# Altium PCB ControlBoard_v3.PcbDoc (part 3 of 3)
Units mm, origin at the board's own origin, x right, y up, seen from the top; angles counter-clockwise.
Board outline 113.28 x 137.67 mm, 2 copper layers (Top Layer, Bottom Layer); 118 components, 107 nets, 631 pads, 214 vias.
Unrouted connection lines stored in the file: 3.
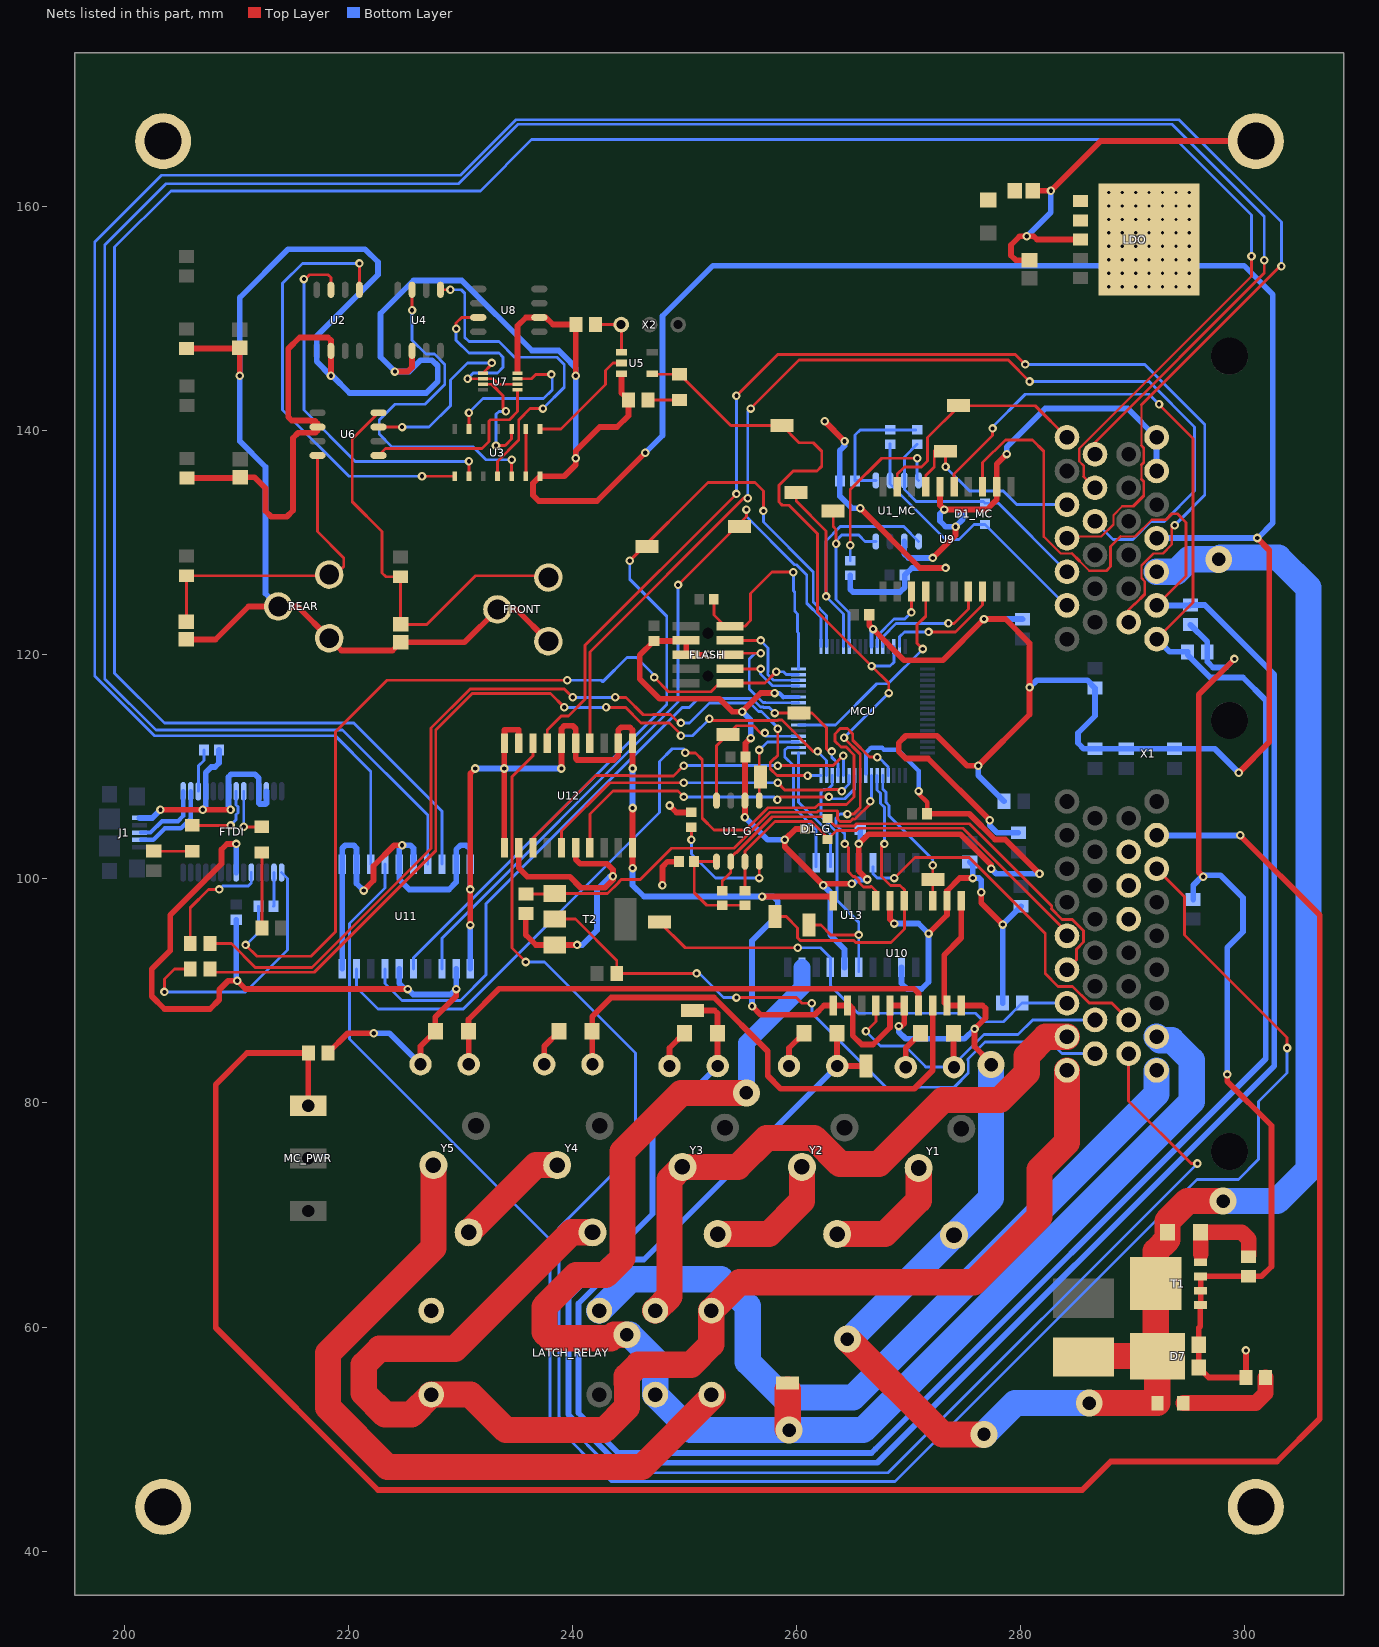
[diagram p2: the nets of this part, all layers, seen from the top]

## Via types
v1: diameter 0.762, hole 0.381, Top Layer to Bottom Layer, 205 vias
v2: diameter 2.4, hole 1.2, Top Layer to Bottom Layer, 9 vias

## Nets (pads, with @x,y where several pads share a name; then routed paths per layer and width w, separated by ;. In a path a pad name is that pad's centre, name@x,y a point inside that pad or via, vN(x,y) a via of type N, cw(c..) or ccw(c..) an arc to the next point about the centre after c; other vN are vias at no path point) (continued)
AGND: C7.1 C12.1 C13.1 C14.1 C15.1 FRONT.2 FRONT.3 LDO.6 MCU.10 R8.1 R9.1 R10.1 R11.1 R13.2 R14.1 R16.2 R17.1 R20.1 R22.1 R23.2 REAR.2 REAR.3 U2.2 U3.7 U4.2 U5.3 U6.2 U7.4 U8.2 X1.B23 | length 454.6
  Top Layer w0.254: C12.1@210.237,147.334 C12.1@210.312,147.409 ; 216.691,140.643 216.931,140.643 U6.2@217.239,140.335
  Top Layer w0.513: C15.1@205.537,121.374 208.126,121.374 211.074,124.322 REAR.2@213.741,124.322 215.446,124.322 REAR.3@218.286,121.482 219.372,120.396 223.939,120.396 C14.1@224.663,121.12 230.362,121.12 FRONT.2@233.299,124.057 235.004,124.057 FRONT.3@237.844,121.217 ; R8.1@205.562,147.334 C12.1@210.237,147.334 ; R9.1@205.588,135.777 210.262,135.777 C13.1@210.337,135.852 211.62,135.852 212.598,134.874 212.598,132.842 213.106,132.334 214.503,132.334 215.049,132.88 215.049,139.357 215.519,139.827 217.043,139.827 217.239,140.023 U6.2@217.239,140.335 ; v1(210.312,144.907) C12.1@210.312,147.409 ; 217.239,140.647 216.99,140.896 216.52,140.896 216.495,140.921 214.933,140.921 214.63,141.224 214.63,147.32 215.646,148.336 218.186,148.336 218.44,148.082 U2.2@218.44,147.135 v1(218.44,144.921) ; v1(224.155,145.288) 225.298,145.288 225.679,145.669 U4.2@225.679,147.135 ; U7.4@235.103,145.282 235.103,149.378 235.839,150.114 U8.2@237.04,150.114 237.617,150.114 238.252,149.479 R11.1@240.298,149.479 v1(240.298,144.921) ; U3.7@237.109,135.944 236.474,135.309 236.474,134.239 236.982,133.731 242.189,133.731 v1(246.507,138.049) ; U3.7@237.199,135.944 239.268,135.944 240.298,136.974 v1(240.298,137.555) 240.298,138.19 242.443,140.335 243.981,140.335 244.997,141.351 R10.1@244.997,142.748 244.37,143.375 U5.3@244.37,145.1 ; C7.1@266.486,123.571 266.486,122.642 v1(266.827,122.301) 269.621,119.507 273.05,119.507 v1(276.733,123.19) 278.638,123.19 280.797,121.031 v1(280.797,117.094) 280.797,114.681 v1(276.225,110.109) 275.209,110.109 272.542,112.776 269.748,112.776 269.113,112.141 269.113,111.379 269.748,110.744 271.745,110.744 v1(277.241,105.248) ; v1(299.466,109.474) 302.201,112.209 302.201,129.345 v1(301.117,130.429)
  Bottom Layer w0.356: MCU.10@266.677,120.734 v1@266.677,122.151
  Bottom Layer w0.4: v1@266.677,122.151 v1(266.827,122.301)
  Bottom Layer w0.513: REAR.2@213.741,124.322 212.598,125.465 212.598,136.779 210.312,139.065 v1(210.312,144.907) 210.312,151.905 214.617,156.21 221.488,156.21 222.631,155.067 222.631,153.924 217.17,148.463 217.17,146.177 218.426,144.921 v1(218.44,144.921) 218.553,144.921 220.091,143.383 226.949,143.383 227.965,144.399 227.965,145.796 227.457,146.304 226.441,146.304 225.425,145.288 v1(224.155,145.288) 222.863,146.58 222.863,150.473 225.806,153.416 230.124,153.416 236.375,147.165 238.784,147.165 239.804,146.145 239.804,146.109 240.298,145.615 v1(240.298,144.921) v1(240.298,137.555) ; v1(246.507,138.049) 248.031,139.573 248.031,150.241 252.532,154.742 287.633,154.742 287.644,154.73 299.931,154.73 299.942,154.742 302.514,152.169 302.514,131.762 301.181,130.429 v1(301.117,130.429) 292.374,130.429 292.247,130.302 X1.B23@292.139,130.41 ; v1(276.225,110.109) 276.225,109.234 R13.2@278.525,106.934 ; v1(276.733,123.19) 280.148,123.19 R14.1@280.162,123.176 ; v1(277.241,105.248) 277.241,104.775 277.89,104.126 R23.2@279.795,104.126 ; v1(280.797,117.094) 281.432,117.729 285.966,117.729 286.618,117.036 286.639,117.014 286.639,114.554 285.115,113.03 285.115,112.127 285.623,111.619 R16.2@286.639,111.619 R22.1@289.433,111.619 R20.1@293.751,111.619 297.321,111.619 v1(299.466,109.474)
AIR+_5V: MCU.43 U12.5 | length 30.4
  Top Layer w0.254: U12.5@239.014,102.767 239.014,104.267 243.332,108.585 v1(249.936,108.585) ; v1(258.318,108.585) 258.953,107.95 262.591,107.95 262.616,107.975 264.008,107.975 264.033,107.95 v1(264.033,107.823)
  Bottom Layer w0.254: v1(249.936,108.585) v1(258.318,108.585) ; v1(264.033,107.823) 264.688,108.478 MCU.43@264.688,109.234
AIR+_12V: U12.17 X1.B14 | length 105.7
  Top Layer w0.203: 291.084,125.44 291.084,126.55 290.785,126.849 290.785,127.971 291.87,129.056 292.7,129.056 293.493,129.849 v1@293.493,131.568
  Top Layer w0.254: U12.17@237.744,112.117 237.744,113.284 239.001,114.541 239.633,114.541 241.122,116.03 241.122,120.853 v1(254.635,134.366) ; v1(254.635,143.129) 258.316,146.81 265.514,146.81 265.517,146.812 279.527,146.812 v1(280.416,145.923) ; X1.B14@289.639,122.91 289.639,123.995 290.174,124.531 290.21,124.531 291.084,125.404 291.084,125.44 ; v1@293.493,131.568 293.497,131.572 v1(293.751,131.572)
  Bottom Layer w0.254: v1(254.635,134.366) v1(254.635,143.129) ; v1(280.416,145.923) 291.084,145.923 296.432,140.575 296.432,134.253 v1(293.751,131.572)
AIR-_5V: MCU.42 U12.7 | length 29.6
  Top Layer w0.254: U12.7@241.554,102.767 241.554,105.791 243.607,107.844 249.407,107.844 v1(249.936,107.315) ; v1(258.29,107.061) 258.544,107.315 v1(262.89,107.315)
  Bottom Layer w0.254: v1(249.936,107.315) 258.036,107.315 v1(258.29,107.061) ; v1(262.89,107.315) 263.042,107.163 264.307,107.163 265.188,108.044 MCU.42@265.188,109.234
AIR-_12V: U12.14 X1.B11 | length 97
  Top Layer w0.254: U12.14@241.554,112.117 241.554,120.269 255.27,133.985 v1(255.651,133.985) ; v1(255.905,141.986) 260.223,146.304 278.892,146.304 v1(280.797,144.399)
  Bottom Layer w0.254: v1(255.651,133.985) 255.651,141.732 v1(255.905,141.986) ; v1(280.797,144.399) 291.48,144.399 295.529,140.35 295.529,134.62 292.819,131.91 291.651,131.91 290.043,130.302 288.247,130.302 X1.B11@286.639,131.91
ALL_GOOD: U3.8 U5.2 | length 10.4
  Top Layer w0.254: U3.8@237.109,140.154 238.96,140.154 242.951,144.145 242.951,145.375 243.626,146.05 U5.2@244.37,146.05
BF_ADJUST_OK: U6.7 U7.5 | length 15
  Top Layer w0.254: U6.7@222.689,140.335 v1(224.79,140.335) ; U7.5@232.003,145.149 232.791,145.937 v1(232.791,146.057)
  Bottom Layer w0.254: v1(224.79,140.335) 227.203,140.335 229.108,142.24 229.108,144.526 230.639,146.057 v1(232.791,146.057)
BMS_OK: bms_ok.1 D2.2 R15.1 U9.5 X1.B20 Y2.COIL1 | length 215.7
  Top Layer w0.254: Y2.COIL1@263.603,83.319 Y2.COIL1@263.627,83.295 ; U9.5@274.066,135.001 274.066,136.144 277.495,139.573 v1(277.495,140.208) ; X1.B20@292.139,121.41 295.402,124.673 295.402,139.306 292.354,142.354 v1(292.354,142.367)
  Top Layer w0.513: Y2.COIL1@263.603,83.319 D2.2@263.603,86.233 ; Y2.COIL1@263.627,83.295 266.168,83.295 bms_ok.1@266.192,83.319
  Bottom Layer w0.254: v1(277.495,140.208) 277.368,140.208 280.416,143.256 291.465,143.256 v1(292.354,142.367)
  Bottom Layer w0.513: Y2.COIL1@263.627,83.295 246.372,66.04 244.475,66.04 240.538,62.103 240.538,52.324 244.094,48.768 266.7,48.768 267.051,49.119 301.883,83.951 ; X1.B20@292.139,121.41 293.28,120.269 R15.1@294.908,120.269 294.908,120.001 296.926,117.983 299.847,117.983 301.879,115.951 301.879,83.955
BMS_OK_5V: MCU.12 U9.17 | length 11
  Top Layer w0.254: v1(273.558,122.809) 274.066,122.809 275.336,124.079 U9.17@275.336,125.56
  Bottom Layer w0.254: MCU.12@267.688,120.734 267.688,121.602 268.87,122.784 273.533,122.784 v1(273.558,122.809)
BR_ADJUST_OK: U6.5 U7.1 | length 17
  Top Layer w0.254: U6.5@222.689,137.795 223.324,138.43 229.656,138.43 229.659,138.428 231.928,138.428 232.539,139.039 232.539,140.845 232.678,140.984 234.365,140.984 235.103,141.722 U7.1@235.103,143.649
BRAKE_FRONT_POT: C14.2 FRONT.1 R5.1 U6.8 | length 37.5
  Top Layer w0.254: U6.8@222.689,141.605 220.345,139.261 220.345,133.67 223.012,131.003 223.012,127.316 223.352,126.976 R5.1@224.663,126.976 C14.2@224.663,122.72 226.987,122.72 231.329,127.062 237.679,127.062 FRONT.1@237.844,126.897
BRAKE_LIGHT_5V: MCU.44 U12.3 | length 33.4
  Top Layer w0.254: U12.3@236.474,102.767 236.474,103.635 242.059,109.22 245.065,109.22 245.09,109.195 249.022,109.195 v1(249.936,110.109) ; v1(258.318,110.109) 263.271,110.109 v1(264.16,110.998)
  Bottom Layer w0.254: v1(249.936,110.109) v1(258.318,110.109) ; v1(264.16,110.998) 264.188,110.97 MCU.44@264.188,109.234
BRAKE_LIGHT_12V: U12.18 X1.A18 | length 152.4
  Top Layer w0.254: v1(235.839,92.583) 234.6,93.822 234.6,109.124 236.474,110.998 U12.18@236.474,112.117 ; X1.A18@289.639,84.41 289.639,80.185 295.224,74.6 v1(295.783,74.6)
  Bottom Layer w0.254: v1(235.839,92.583) 237.49,92.583 245.618,84.455 245.618,75.692 238.785,68.859 238.785,52.025 243.821,46.99 268.173,46.99 v1(295.783,74.6)
BRAKE_REAR_POT: C15.2 R6.1 REAR.1 U6.4 | length 29.4
  Top Layer w0.254: C15.2@205.537,122.974 R6.1@205.537,127.062 218.186,127.062 REAR.1@218.286,127.162 218.856,127.162 219.583,127.889 219.583,128.651 217.239,130.995 U6.4@217.239,137.795
BRK_RANGE_OK: U3.6 U3.9 | length 4.2
  Top Layer w0.254: U3.6@235.839,135.944 U3.9@235.839,140.154
BSPD_OK_5V: bspd_ok.1 BSPD_OK.1 MCU.14 U5.4 U10.7 | length 74.8
  Top Layer w0.254: U5.4@247.12,145.1 247.179,145.041 BSPD_OK.1@249.555,145.041 254.134,140.462 bspd_ok.1@258.699,140.462 260.223,138.938 261.493,138.938 262.255,138.176 262.255,136.833 261.82,136.398 259.701,136.398 258.445,135.142 258.445,133.63 258.725,133.35 259.334,133.35 261.874,130.81 261.874,123.825 v1(266.7,118.999) 268.224,117.475 v1(268.224,116.586) ; v1(264.243,112.605) 264.243,112.57 265.684,111.13 265.684,106.386 265.074,105.776 265.059,105.791 v1(264.541,105.791) ; v1(264.296,103.124) 264.626,102.794 264.626,100.635 265.033,100.228 265.196,100.228 265.582,99.842 265.582,99.679 265.972,99.289 266.593,99.289 266.618,99.314 266.7,99.314 267.081,98.933 U10.7@267.081,98.054
  Bottom Layer w0.254: v1(264.243,112.605) v1(268.224,116.586) ; v1(264.296,103.124) 264.296,104.035 263.525,104.806 263.525,105.423 263.893,105.791 v1(264.541,105.791) ; v1(266.7,118.999) 268.351,118.999 268.688,119.336 MCU.14@268.688,120.734
BSPD_OK_12V: D1.2 U10.14 X1.A11 Y1.COIL1 | length 29.4
  Top Layer w0.254: v1(266.192,86.393) 267.081,87.282 U10.14@267.081,88.704
  Top Layer w0.513: D1.2@274.017,86.233 274.017,83.234 Y1.COIL1@274.052,83.199
  Bottom Layer w0.254: v1(266.192,86.393) 267.495,85.09 269.634,85.09 269.648,85.077 269.684,85.077 271.512,83.248 271.512,83.199 Y1.COIL1@274.052,83.199 274.052,83.425 276.733,86.106 279.781,86.106 281.085,87.41 X1.A11@286.639,87.41
CAN_H_GEN: D1_G.1 R3_G.2 U1_G.7 X1.A5 | length 38.8
  Top Layer w0.254: R3_G.2@255.397,98.963 U1_G.7@255.397,101.542 255.397,102.474 258.062,105.139 261.329,105.139 262.763,103.705 D1_G.1@262.763,103.51 263.58,104.327 263.922,104.327 263.931,104.318 265.324,104.318 265.528,104.521 274.864,104.521 284.139,95.246 X1.A5@284.139,94.91
CAN_H_MC: D1_MC.1 R3_MC.2 U1_MC.7 X1.B3 | length 22.1
  Bottom Layer w0.254: R3_MC.2@270.764,138.796 269.621,137.653 U1_MC.7@269.621,135.567 269.621,134.747 270.679,133.689 276.677,133.689 D1_MC.1@276.828,133.538 278.011,133.538 X1.B3@284.139,127.41
CAN_L_GEN: D1_G.2 R2_G.1 U1_G.6 X1.A4 | length 44.9
  Top Layer w0.254: R2_G.1@253.365,98.948 253.365,99.822 254.127,100.584 U1_G.6@254.127,101.542 254.127,101.908 254.556,102.337 254.616,102.337 257.825,105.546 262.627,105.546 D1_G.2@262.763,105.41 263.44,104.733 264.09,104.733 264.099,104.724 265.156,104.724 265.359,104.927 275.438,104.927 282.785,97.58 282.785,97.349 ; 282.767,97.331 283.705,96.393 284.607,96.393 285.623,95.377 285.623,94.361 284.988,93.726 284.988,92.759 X1.A4@284.139,91.91
CAN_L_MC: D1_MC.2 R2_MC.1 U1_MC.6 X1.B2 | length 25
  Bottom Layer w0.254: R2_MC.1@268.351,138.839 R2_MC.1@268.351,138.796 U1_MC.6@268.351,135.567 268.351,135.255 273.304,130.302 274.497,130.302 275.833,131.638 D1_MC.2@276.828,131.638 284.056,124.41 X1.B2@284.139,124.41
D_N: FTDI.16 J1.2 | length 7.7
  Bottom Layer w0.381: J1.2@201.477,103.49 202.591,103.49 203.618,104.517 205.042,104.517 205.881,105.356 205.881,105.365 205.922,105.406 FTDI.16@205.922,107.821
D_P: FTDI.15 J1.3 | length 6.6
  Bottom Layer w0.381: J1.3@201.477,104.14 202.342,104.14 203.354,105.152 204.779,105.152 205.246,105.619 FTDI.15@205.246,107.821
DCDC_DISABLE_5V: MCU.36 U11.9 | length 80.2
  Top Layer w0.254: v1(250.063,111.252) 250.966,111.252 251.585,110.634 251.585,105.417 252.635,104.366 255.471,104.366 257.464,106.359 261.653,106.359 261.949,106.655 264.474,106.655 265.136,107.317 265.136,111.058 264.434,111.76 263.969,111.76 263.44,112.289 263.44,112.945 263.906,113.411 264.541,113.411 265.018,112.934 265.018,112.371 266.518,110.871 v1(267.208,110.871)
  Bottom Layer w0.254: U11.9@220.726,91.972 220.726,90.297 222.631,88.392 230.251,88.392 247.777,105.918 247.777,110.49 248.906,111.619 249.936,111.619 ; v1(267.208,110.871) 267.307,110.871 268.188,109.99 MCU.36@268.188,109.234
DCDC_DISABLE_12V: U11.13 X1.B4 | length 228.2
  Top Layer w0.203: X1.B4@284.285,130.556 287.2,130.556 288.285,131.641 288.285,132.471 289.078,133.264 290.049,133.264 ; 290.785,135.679 290.785,136.971 ; 290.785,138.679 290.785,142.322 ; 290.993,134.208 290.993,135.471 ; 290.993,137.179 290.993,138.471
  Top Layer w0.254: X1.B4@284.139,130.41 X1.B4@284.285,130.556 ; 290.049,133.264 290.993,134.208 ; 290.785,135.679 290.993,135.471 ; 290.785,136.971 290.993,137.179 ; 290.785,138.679 290.993,138.471 ; 290.785,142.322 303.149,154.686 v1(303.276,154.686)
  Bottom Layer w0.254: U11.13@221.996,101.322 221.996,109.601 218.821,112.776 202.692,112.776 197.358,118.11 197.358,156.845 203.327,162.814 230.004,162.814 234.957,167.767 294.132,167.767 303.276,158.623 v1(303.276,154.686)
DGND: C1_G.1 C1_MC.1 C2_G.1 C2_MC.1 C3.1 C4.1 C5.1 C6.1 C8.1 C10.1 C11.1 D1.1 D1_G.3 D1_MC.3 D2.1 D3.1 D4.1 D5.1 D7.1 D7.2 FLASH.3 FLASH.5 FTDI.7 FTDI.18 FTDI.21 FTDI.25 FTDI.26 J1.5 LATCH_RELAY.1 LDO.3 MCU.40 MCU.59 pad.4 R1_G.1 R1_MC.1 R12.2 R15.2 R18.2 R19.2 R21.2 R24.2 R28.1 R29.1 R31.1 R32.1 T1.1 T1.2 T1.3 T2.3 U1_G.2 U1_MC.2 U9.2 U9.6 U10.2 U10.6 U11.2 U11.6 U12.2 U12.6 U13.2 U13.6 X1.A22 X1.A23 X1.A24 X1.B25 X1.B26 Y1.COIL2 Y2.COIL2 Y3.COIL2 Y4.COIL2 Y5.COIL2 | length 499.7
  Top Layer w0.4: v1(270.891,107.844) 270.891,107.611 271.653,106.849 C8.1@271.653,105.812
  Top Layer w0.513: v1(203.225,106.172) v1(207.01,106.172) v1(209.478,106.172) ; v1(209.986,103.124) 209.169,103.124 208.661,102.616 208.661,101.346 204.089,96.774 204.089,93.599 202.438,91.948 202.438,89.535 203.581,88.392 207.645,88.392 208.462,89.209 208.462,90.098 209.269,90.905 v1(210.086,90.905) ; v1@210.185,90.805 210.82,90.17 v1(225.298,90.17) ; R29.1@218.172,84.455 219.95,86.233 v1(222.25,86.233) ; Y5.COIL2@226.434,83.455 226.434,85.067 D5.1@227.76,86.393 227.76,87.679 229.616,89.535 v1(229.616,90.17) ; U12.2@235.204,102.767 235.204,100.965 235.966,100.203 239.759,100.203 240.741,99.221 242.898,99.221 243.607,99.93 v1(243.607,100.228) 243.607,100.817 243.078,101.346 240.665,101.346 240.284,101.727 U12.6@240.284,102.767 ; R28.1@235.839,96.915 235.839,95.002 236.731,94.11 T2.3@238.429,94.11 v1(240.408,94.11) ; Y4.COIL2@237.483,83.455 237.483,85.067 D4.1@238.809,86.393 ; v1(248.031,99.441) 248.031,101.092 248.481,101.542 C2_G.1@249.515,101.542 ; Y3.COIL2@248.659,83.295 248.659,84.907 D3.1@249.985,86.233 ; v1(248.666,106.553) 249.286,105.933 R1_G.1@250.615,105.933 ; v1(252.095,120.015) FLASH.5@250.145,120.015 FLASH.3@250.145,121.285 250.105,121.245 C5.1@247.269,121.245 245.999,119.975 245.999,117.856 247.777,116.078 253.111,116.078 254.257,114.932 v1(255.146,114.932) 256.799,116.586 v1(258.037,116.586) ; v1(255.397,105.51) U1_G.2@255.397,106.992 C1_G.1@255.397,110.744 ; C1_G.1@255.437,110.871 255.437,112.102 v1(255.905,112.57) ; Y2.COIL2@259.327,83.295 259.327,84.907 D2.1@260.653,86.233 ; D1_G.3@260.763,104.46 259.923,104.46 v1(258.953,103.49) 258.953,102.87 v1(262.382,99.441) 262.509,99.568 v1(264.922,99.568) ; v1(262.509,140.843) v1(264.287,139.065) ; v1(265.684,133.096) 271.018,127.762 v1(273.304,127.762) ; v1(266.319,99.949) 265.557,100.711 v1(265.557,103.124) 266.418,103.985 274.642,103.985 277.368,101.259 v1(277.368,100.91) ; U10.6@268.351,98.054 268.351,96.393 v1(268.732,96.012) ; Y1.COIL2@269.752,83.199 269.752,84.918 D1.1@271.067,86.233 ; C8.1@271.653,105.812 275.414,105.812 277.717,103.51 278.633,103.51 v1(281.686,100.457) ; v1(271.78,95.123) 273.431,96.774 U10.2@273.431,98.054 273.431,98.933 274.574,100.076 v1(275.717,100.076) ; v1(272.161,128.651) 274.193,130.683 v1(274.193,131.445) ; U9.6@272.796,135.001 272.796,133.35 v1(273.177,132.969) 276.987,132.969 277.876,133.858 U9.2@277.876,135.001 277.876,137.033 v1(278.765,137.922) ; v1(276.479,98.813) 276.479,97.846 v1(278.398,95.927) ; C4.1@280.797,155.232 279.559,155.232 279.146,155.645 279.146,156.591 279.908,157.353 v1(280.543,157.353) 281.178,157.353 281.467,157.064 LDO.3@285.34,157.064 ; C3.1@281.089,161.417 v1(282.702,161.417) 287.147,165.862 pad.4@300.99,165.862 ; v1(296.291,100.203) 295.906,100.588 295.906,116.455 v1(299.085,119.634) ; v1(298.449,82.55) 298.449,81.916 302.387,77.978 302.387,65.405 301.512,64.53 R31.1@300.355,64.53 296.084,64.53 T1.3@296.07,64.516 T1.2@296.07,63.246 T1.1@296.07,61.976 296.037,61.943 296.037,60.071 295.91,59.944 D7.2@295.91,58.42 D7.1@295.91,56.388 296.799,55.499 R32.1@300.115,55.499 v1(300.115,57.912)
  Bottom Layer w0.356: 258.826,116.234 MCU.59@260.188,116.234 ; MCU.40@266.192,109.4 266.192,111.252
  Bottom Layer w0.4: v1(258.037,116.586) 258.474,116.586 258.826,116.234 ; 266.192,111.252 266.585,111.645 266.612,111.645 266.654,111.687 267.643,111.687 267.804,111.526 269.023,111.526 270.891,109.658 v1(270.891,107.844)
  Bottom Layer w0.508: v1(280.543,157.353) 282.702,159.512 v1(282.702,161.417)
  Bottom Layer w0.513: J1.5@201.35,105.44 202.493,105.44 v1(203.225,106.172) ; v1(207.01,106.172) 207.274,106.436 FTDI.18@207.274,107.821 207.274,109.498 207.758,109.982 208.081,109.982 208.447,110.348 C11.1@208.447,111.506 ; v1(209.478,106.172) 209.302,106.348 FTDI.21@209.302,107.821 209.302,109.099 209.55,109.347 211.672,109.347 212.006,109.013 FTDI.25@212.006,107.821 212.006,106.764 212.09,106.68 212.598,106.68 212.682,106.764 FTDI.26@212.682,107.821 ; FTDI.7@209.978,100.571 209.986,100.579 v1(209.986,103.124) ; C10.1@209.986,96.353 209.986,91.004 v1(210.086,90.905) ; v1(222.25,86.233) 223.656,86.233 Y5.COIL2@226.434,83.455 ; U11.6@224.536,91.972 224.536,90.678 225.044,90.17 v1(225.298,90.17) 225.778,89.69 229.136,89.69 v1(229.616,90.17) U11.2@229.616,91.972 ; v1(240.408,94.11) 240.875,94.11 242.189,95.424 242.189,99.06 243.357,100.228 v1(243.607,100.228) ; v1(255.146,114.932) 255.905,114.173 v1(255.905,112.57) ; v1(255.397,105.51) 257.402,103.505 v1@258.699,103.505 ; v1(262.382,99.441) 263.017,98.806 263.017,94.996 264.287,93.726 U13.6@264.287,92.099 ; v1(264.287,139.065) 264.287,138.656 263.866,138.235 C2_MC.1@263.866,135.509 263.866,134.152 264.922,133.096 v1(265.684,133.096) ; R1_MC.1@264.795,127.112 264.795,125.857 265.049,125.603 269.24,125.603 269.661,126.024 C1_MC.1@269.661,127.127 270.296,127.762 v1(273.304,127.762) ; v1(264.922,99.568) 265.049,99.568 265.43,99.949 v1(266.319,99.949) ; v1(265.557,103.124) 265.684,103.251 C6.1@265.684,104.354 ; v1(268.732,96.012) 270.891,96.012 v1(271.78,95.123) 271.78,90.802 271.148,90.17 269.875,90.17 269.367,90.678 U13.2@269.367,92.099 ; U1_MC.2@269.621,130.117 269.621,129.032 270.002,128.651 v1(272.161,128.651) ; v1(273.177,132.969) 272.796,132.588 272.796,131.953 273.304,131.445 v1(274.193,131.445) 274.828,132.08 D1_MC.3@274.828,132.588 ; R19.2@275.463,101.501 275.717,101.247 v1(275.717,100.076) 276.288,100.076 276.479,99.885 v1(276.479,98.813) ; v1(277.368,100.91) 277.821,100.457 v1(281.686,100.457) ; R18.2@278.398,88.91 v1(278.398,95.927) R21.2@280.035,97.564 ; v1(278.765,137.922) 278.765,138.557 282.194,141.986 289.563,141.986 X1.B26@292.139,139.41 X1.B25@292.139,136.41 ; R12.2@295.148,122.696 296.658,121.186 R15.2@296.658,120.269 296.658,119.394 297.18,118.872 298.323,118.872 v1(299.085,119.634) ; R24.2@295.402,98.157 295.402,99.441 296.291,100.33 297.829,100.33 299.847,98.312 299.847,95.285 298.449,93.887 v1(298.449,82.55)
DISCHARGE_5V: dschrg.1 MCU.2 U11.5 | length 78.5
  Top Layer w0.254: v1(245.11,128.397) 252.095,135.382 256.286,135.382 257.048,134.62 v1(257.048,132.842)
  Bottom Layer w0.254: U11.5@225.806,91.972 225.806,92.964 248.412,115.57 248.412,123.444 245.11,126.746 v1(245.11,128.397) ; v1(257.048,132.842) 257.048,131.855 261.493,127.41 261.493,124.714 262.688,123.519 MCU.2@262.688,120.734
DISCHARGE_12V: U11.17 X1.B13 | length 215.8
  Top Layer w0.254: X1.B13@286.639,137.91 286.639,138.961 301.752,154.074 v1(301.752,155.227)
  Bottom Layer w0.254: U11.17@227.076,101.322 227.076,105.695 219.487,113.284 202.819,113.284 198.247,117.856 198.247,156.591 203.708,162.052 229.817,162.052 235.125,167.361 293.522,167.361 301.752,159.131 v1(301.752,155.227)
FAN_EN_5V: fan_en.1 MCU.46 U13.5 | length 24.4
  Top Layer w0.254: fan_en.1@261.112,95.885 262.17,95.885 263.059,94.996 v1(265.557,94.996)
  Bottom Layer w0.254: MCU.46@263.188,109.234 263.188,108.375 262.788,107.975 262.407,107.975 262.168,107.736 262.168,105.588 263.621,104.135 263.621,100.142 263.596,100.117 263.596,98.1 265.557,96.139 v1(265.557,94.996) U13.5@265.557,92.099 U13.5@265.557,91.735
FAN_EN_OUT: U13.17 X1.A19 | length 32.4
  Top Layer w0.254: v1(268.732,100.076) 270.564,101.908 275.409,101.908 282.194,95.123 282.194,91.567 283.351,90.41 284.621,90.41 286.121,88.91 288.139,88.91 X1.A19@289.639,87.41
  Bottom Layer w0.254: U13.17@266.827,101.085 266.827,100.457 267.208,100.076 v1(268.732,100.076)
FAN_PWM_5V: MCU.39 R28.2 T2.1 | length 37.9
  Top Layer w0.254: R28.2@235.839,98.665 238.384,98.665 T2.1@238.429,98.71 238.454,98.685 243.12,98.685 244.143,99.708 244.143,99.744 244.348,99.949 246.054,99.949 248.848,102.743 254.423,102.743 257.632,105.952 261.821,105.952 261.958,106.089 263.623,106.089 263.652,106.06 263.652,105.368 263.881,105.139 264.259,105.139 264.267,105.131 264.815,105.131 265.018,105.334 265.227,105.334 266.573,106.68 v1(266.573,106.934)
  Bottom Layer w0.254: v1(266.573,106.934) 266.688,107.049 MCU.39@266.688,109.234 MCU.39@266.7,109.246
FAN_PWM_12V: R25.1 T2.2 X1.A10 | length 58.5
  Top Layer w0.254: T2.2@238.429,96.41 240.267,96.41 243.953,92.724 R25.1@243.953,91.567 v1(251.079,91.567) ; v1(254.635,89.408) 259.969,89.408 260.477,88.9 v1(261.366,88.9)
  Bottom Layer w0.254: v1(251.079,91.567) 251.333,91.567 253.492,89.408 v1(254.635,89.408) ; v1(261.366,88.9) 261.366,88.011 267.97,81.407 274.069,81.407 275.331,82.669 275.331,83.754 275.306,83.78 275.306,83.917 276.824,85.435 282.663,85.435 283.688,84.41 X1.A10@286.639,84.41
FTDI_GREEN: FTDI.23 FTDI_G.2 | length 4.8
  Top Layer w0.254: v1(210.654,104.648) 212.265,104.648 FTDI_G.2@212.272,104.655
  Bottom Layer w0.254: v1(210.654,104.648) FTDI.23@210.654,107.821
FTDI_RED: FTDI.22 FTDI_R.2 | length 6.8
  Top Layer w0.254: FTDI_R.2@206.049,104.782 209.09,104.782 209.097,104.775 v1(209.478,104.775)
  Bottom Layer w0.254: v1(209.478,104.775) 209.978,105.275 209.978,105.738 210.138,105.898 210.138,106.446 209.978,106.606 FTDI.22@209.978,107.821
FTDI_UART_RX: MCU.48 R34.2 | length 79.7
  Top Layer w0.254: R34.2@207.631,94.234 209.55,94.234 211.684,92.1 216.743,92.1 227.371,102.728 227.371,113.459 230.879,116.967 239.268,116.967 v1(240.03,116.205) ; v1(243.811,116.205) 244.769,116.205 246.318,114.656 247.162,114.656 247.187,114.681 248.753,114.681 v1@249.515,113.919 ; v1(258.318,113.411) 258.318,111.007 258.08,110.769 258.044,110.769 257.658,110.383 257.658,109.835 258.248,109.245 260.96,109.245 v1(260.985,109.22)
  Bottom Layer w0.254: v1(240.03,116.205) v1(243.811,116.205) ; v1(249.682,113.919) 250.444,113.919 252.222,115.697 255.838,115.697 256.6,114.935 256.879,114.935 258.318,113.496 v1(258.318,113.411) ; v1(260.985,109.22) 262.174,109.22 MCU.48@262.188,109.234
FTDI_UART_TX: MCU.47 R33.2 | length 76.9
  Top Layer w0.254: R33.2@207.631,91.948 207.91,91.669 216.957,91.669 227.802,102.514 227.802,113.28 231.057,116.535 238.049,116.535 v1(239.268,115.316) ; v1(242.996,115.316) 244.729,115.316 246.126,113.919 248.666,113.919 v1@249.745,112.84 ; v1(252.222,114.287) 252.361,114.148 258.338,114.148 258.363,114.173 258.699,114.173 261.493,111.379 v1(261.874,111.379)
  Bottom Layer w0.254: v1(239.268,115.316) v1(242.996,115.316) ; v1(249.682,112.776) 250.711,112.776 v1(252.222,114.287) ; v1(261.874,111.379) 262.688,110.565 MCU.47@262.688,109.234
GLV: C3.2 D6.2 D7.3 LDO.1 LDO.2 LDO_D.2 PTC.2 RVP_LED.1 T1.mb U10.1 U10.10 U10.11 U10.12 U10.15 U10.16 U10.19 U10.20 U11.1 U11.10 U11.11 U11.12 U11.15 U11.16 U11.19 U11.20 U12.1 U12.10 U12.11 U12.12 U12.15 U12.16 U12.19 U12.20 X1.B22 Y1.COM | length 355.9
  Top Layer w0.513: v1(221.361,98.963) 222.25,99.852 222.25,101.161 224.086,102.997 v1(224.79,102.997) ; v1(230.886,95.885) v1(230.886,99.06) 230.886,109.412 v1(231.329,109.855) ; U12.1@233.934,102.767 233.92,102.781 v1(233.92,109.855) 233.92,112.103 U12.20@233.934,112.117 233.934,113.284 233.96,113.31 235.204,113.31 U12.19@235.204,112.117 ; v1(239.014,109.855) U12.16@239.014,112.117 239.014,113.411 239.268,113.665 240.03,113.665 240.284,113.411 U12.15@240.284,112.117 240.284,110.744 240.408,110.62 243.716,110.62 244.094,110.998 U12.12@244.094,112.117 244.094,113.284 244.348,113.538 245.11,113.538 245.364,113.284 U12.11@245.364,112.117 v1(245.364,109.855) ; v1(245.364,100.965) U12.10@245.364,102.767 v1(245.364,106.331) ; v1(256.032,88.646) 256.794,87.884 261.62,87.884 262.44,88.704 U10.11@263.271,88.704 U10.12@264.541,88.704 264.747,88.704 265.007,88.444 265.007,86.021 265.811,85.217 266.827,85.217 268.351,86.741 U10.15@268.351,88.704 U10.16@269.621,88.704 269.621,87.122 v1@269.367,86.868 ; v1(256.921,98.425) 262.9,98.425 U10.10@263.271,98.054 ; U10.1@274.701,98.054 274.701,94.742 273.177,93.218 273.177,88.958 U10.19@273.431,88.704 U10.20@274.701,88.704 276.606,88.704 276.86,88.45 276.86,87.584 v1(275.89,86.614) 275.89,85.044 v2@277.114,83.82
  Top Layer w2.34: v2(264.541,58.928) 273.05,50.419 v2(276.733,50.419) ; PTC.2@285.623,57.319 285.708,57.404 D7.3@292.203,57.404 ; v2(286.131,53.213) RVP_LED.1@292.213,53.213 292.203,53.223 D7.3@292.203,57.404 ; v2(298.069,71.247) 294.894,71.247 293.116,69.469 D6.2@293.116,68.453 293.116,67.818 292.07,66.772 T1.mb@292.07,63.881 292.07,57.537 D7.3@292.203,57.404
  Bottom Layer w0.513: U11.10@219.456,91.972 U11.11@219.456,101.322 219.456,102.743 219.71,102.997 220.472,102.997 220.726,102.743 U11.12@220.726,101.322 220.726,99.598 v1(221.361,98.963) ; U11.16@225.806,101.322 225.806,102.743 225.552,102.997 v1(224.79,102.997) 224.536,102.743 U11.15@224.536,101.322 224.536,99.949 225.425,99.06 228.981,99.06 229.616,99.695 U11.19@229.616,101.322 229.616,102.616 229.997,102.997 230.509,102.997 230.886,102.62 U11.20@230.886,101.322 v1(230.886,99.06) ; U11.1@230.886,91.972 v1(230.886,95.885) ; v1(231.329,109.855) v1(233.92,109.855) v1(239.014,109.855) ; v1(245.364,100.965) 245.364,99.441 246.38,98.425 v1(256.921,98.425) 257.909,98.425 258.318,98.016 258.318,96.774 256.032,94.488 v1(256.032,88.646) ; v1(245.364,106.331) v1(245.364,109.855) ; v1(269.113,86.868) 269.113,86.364 269.752,85.725 275.001,85.725 v1(275.89,86.614)
  Bottom Layer w2.34: v2(264.541,58.928) 264.781,58.928 Y1.COM@274.052,68.199 277.368,71.515 v2(277.368,83.425) ; v2(276.733,50.419) 279.527,53.213 v2(286.131,53.213) ; X1.B22@292.139,127.41 293.907,127.41 295.021,128.524 v2@297.561,128.524 ; v2(297.688,128.524) 297.842,128.678 302.995,128.678 305.689,125.984 305.689,74.041 302.895,71.247 v2(298.069,71.247)
IMD_OK: D3.2 imd_ok.1 R12.1 U9.3 X1.B21 Y3.COIL1 | length 213.6
  Top Layer w0.203: 282.067,130.567 283.578,129.056 284.583,129.056 ; 285.285,128.349 286.126,127.508 ; 288.925,130.556 290.2,130.556 291.7,132.056 292.965,132.056
  Top Layer w0.254: Y3.COIL1@252.935,83.319 Y3.COIL1@252.959,83.295 ; U9.3@276.606,135.001 276.606,137.16 278.638,139.192 281.051,139.192 282.067,138.176 282.067,130.567 ; 284.583,129.056 285.285,128.354 285.285,128.349 ; 286.126,127.508 287.655,127.508 288.036,127.889 288.036,129.667 288.925,130.556 ; X1.B21@292.139,124.41 294.767,127.038 294.767,131.826 294.005,132.588 293.497,132.588 292.965,132.056
  Top Layer w0.513: imd_ok.1@250.698,88.265 252.681,88.265 252.935,88.011 D3.2@252.935,86.233 Y3.COIL1@252.935,83.319
  Bottom Layer w0.513: Y3.COIL1@252.959,83.295 247.142,77.478 247.142,70.104 239.649,62.611 239.649,52.197 243.967,47.879 267.208,47.879 302.641,83.312 302.641,118.237 296.432,124.446 R12.1@295.148,124.446 295.112,124.41 X1.B21@292.139,124.41
IMD_OK_5V: MCU.15 U9.18 | length 10.6
  Top Layer w0.254: v1(271.78,122.047) 274.193,122.047 276.606,124.46 U9.18@276.606,125.56
  Bottom Layer w0.254: MCU.15@269.188,120.734 269.188,121.614 269.621,122.047 v1(271.78,122.047)
JTAG_TCLK: FLASH.4 MCU.62 | length 8.9
  Top Layer w0.254: FLASH.4@254.045,121.285 v1@256.667,121.285
  Bottom Layer w0.254: v1(256.794,121.285) 257.454,120.625 257.454,118.471 257.429,118.446 257.429,118.237 257.932,117.734 MCU.62@260.188,117.734
JTAG_TDI: FLASH.8 MCU.61 | length 7
  Top Layer w0.254: FLASH.8@254.045,118.745 v1(256.794,118.745)
  Bottom Layer w0.254: v1(256.794,118.745) 256.794,118.297 257.845,117.246 260.176,117.246 MCU.61@260.188,117.234
JTAG_TDO: FLASH.6 MCU.58 | length 11.6
  Top Layer w0.254: FLASH.6@254.045,120.015 254.172,120.142 v1(256.794,120.142)
  Bottom Layer w0.254: v1(256.794,120.142) 256.286,120.142 255.778,119.634 255.778,116.967 256.997,115.748 257.216,115.748 257.235,115.729 260.183,115.729 MCU.58@260.188,115.734
JTAG_TMS: FLASH.2 MCU.64 R30.1 | length 21.2
  Top Layer w0.254: R30.1@252.618,124.968 252.618,123.556 253.619,122.555 FLASH.2@254.045,122.555 255.397,122.555 255.905,123.063 255.905,125.485 257.801,127.381 v1(259.715,127.381)
  Bottom Layer w0.254: v1(259.715,127.381) 259.715,125.721 259.842,125.594 259.842,123.911 260.096,123.657 260.096,122.047 260.188,121.955 MCU.64@260.188,118.734
LATCH_BTN_IN: LATCH_RELAY.4 LATCH_RELAY.8 X1.A1 Y4.COM | length 116.4
  Top Layer w2.34: Y4.COM@241.783,68.455 239.905,68.455 229.516,58.066 222.785,58.066 221.361,56.642 221.361,54.102 223.266,52.197 225.625,52.197 LATCH_RELAY.8@227.396,53.968 230.893,53.968 234.061,50.8 242.824,50.8 244.868,52.844 244.868,54.992 244.843,55.017 244.843,55.613 245.872,56.642 250.571,56.642 252.396,58.467 LATCH_RELAY.4@252.396,61.468 254.936,64.008 275.844,64.008 281.686,69.85 281.686,74.041 284.139,76.494 X1.A1@284.139,82.91
LATCH_BTN_OUT: LATCH_RELAY.3 X1.A2 Y3.NO | length 55.8
  Top Layer w2.34: LATCH_RELAY.3@247.396,61.468 248.659,62.731 248.659,73.145 Y3.NO@249.809,74.295 254.762,74.295 257.334,76.867 261.567,76.867 263.885,74.549 267.335,74.549 273.057,80.271 275.768,80.271 275.777,80.262 278.128,80.262 280.543,82.677 280.543,84.201 282.252,85.91 X1.A2@284.139,85.91
LATCH_LED: LATCH_RELAY.2 X1.A26 | length 71.5
  Bottom Layer w2.34: LATCH_RELAY.2@242.396,61.468 245.19,64.262 253.238,64.262 255.651,61.849 255.651,56.896 258.826,53.721 265.049,53.721 292.139,80.811 X1.A26@292.139,82.91
MC_EN: mc_en.1 R18.1 U13.7 X1.A3 | length 42.1
  Top Layer w0.254: mc_en.1@247.777,96.139 250.063,93.853 v1(260.096,93.853)
  Bottom Layer w0.254: v1(260.096,93.853) 262.128,93.853 263.017,92.964 U13.7@263.017,92.099 263.017,90.468 265.474,88.011 275.89,88.011 ; 275.971,88.011 276.733,87.249 278.477,87.249 280.138,88.91 R18.1@280.148,88.91 X1.A3@284.139,88.91
MC_EN_5V: MCU.49 U13.14 | length 11.3
  Bottom Layer w0.254: MCU.49@260.188,111.234 260.188,106.842 263.017,104.013 U13.14@263.017,101.449 U13.14@263.017,101.085
MC_PWR_EN: MC_PWR.1 R29.2 X1.A33 | length 205.5
  Top Layer w0.513: MC_PWR.1@216.408,79.757 216.408,84.441 R29.2@216.422,84.455 210.947,84.455 208.153,81.661 208.153,59.944 222.631,45.466 285.496,45.466 288.036,48.006 302.895,48.006 306.705,51.816 306.705,96.774 v1(299.593,103.886)
  Bottom Layer w0.513: X1.A33@292.163,103.886 v1(299.593,103.886)
MCU_REDUN_1_5V: MCU.37 redun_1.1 U10.3 | length 13
  Top Layer w0.254: U10.3@272.161,98.054 redun_1.1@272.161,99.949 v1(272.161,101.219)
  Bottom Layer w0.254: MCU.37@267.688,109.234 267.688,108.025 267.97,107.743 267.97,106.843 268.249,106.564 268.249,105.639 272.161,101.727 v1(272.161,101.219)
MCU_REDUN_1_12V: D4.2 U10.18 Y4.COIL1 | length 46.5
  Top Layer w0.254: Y4.COIL1@241.759,83.479 Y4.COIL1@241.783,83.455
  Top Layer w0.513: Y4.COIL1@241.759,83.479 D4.2@241.759,86.393 241.759,87.708 243.459,89.408 252.636,89.408 257.429,84.615 257.429,82.423 258.572,81.28 270.51,81.28 272.161,82.931 U10.18@272.161,88.704
MCU_REDUN_2_5V: MCU.38 redun_2.1 U10.5 | length 28.9
  Top Layer w0.254: redun_2.1@258.064,96.647 259.08,96.647 260.096,95.631 260.096,94.751 260.334,94.513 265.106,94.513 265.283,94.336 268.418,94.336 269.621,95.539 U10.5@269.621,98.054 269.621,99.029 269.24,99.41 268.382,99.41 267.589,100.203 267.589,102.87 v1(267.843,103.124)
  Bottom Layer w0.254: MCU.38@267.188,109.234 267.188,107.95 267.495,107.643 267.495,106.743 267.843,106.395 v1(267.843,103.124)
MCU_REDUN_2_12V: D5.2 U10.17 Y5.COIL1 | length 46.6
  Top Layer w0.513: Y5.COIL1@230.734,83.455 230.734,86.369 D5.2@230.71,86.393 230.71,87.454 233.454,90.198 270.482,90.198 270.891,89.789 U10.17@270.891,88.704
NAND1: U3.10 U7.7 | length 9.7
  Top Layer w0.254: U7.7@232.003,144.149 232.787,144.149 233.807,143.129 v1@233.807,141.986 ; v1(233.172,138.684) 233.992,138.684 234.569,139.261 U3.10@234.569,140.154
  Bottom Layer w0.254: v1(233.172,138.684) 233.172,141.478 233.426,141.732 v1(234.061,141.732)
NAND2: U3.13 U7.3 | length 14.2
  Top Layer w0.254: U3.13@230.759,140.154 v1(230.759,141.619) ; U7.3@235.103,144.649 236.343,144.649 236.728,145.034 v1(238.125,145.034)
  Bottom Layer w0.254: v1(230.759,141.619) 232.015,142.875 237.408,142.875 238.188,143.656 v1@238.188,144.97
NetBSPD_OK_2: BSPD_OK.2 R10.2 | length 2.8
  Top Layer w0.254: R10.2@246.747,142.748 249.548,142.748 BSPD_OK.2@249.555,142.741
NetC2_GEN_2: C2_G.2 R2_G.2 R3_G.1 U1_G.5 | length 9.8
  Top Layer w0.254: U1_G.5@252.857,101.542 C2_G.2@250.865,101.542 250.865,98.766 251.983,97.648 R2_G.2@253.365,97.648 255.382,97.648 R3_G.1@255.397,97.663
NetC2_MC_2: C2_MC.2 R2_MC.2 R3_MC.1 U1_MC.5 | length 11.6
  Bottom Layer w0.254: U1_MC.5@267.081,135.567 265.274,135.567 C2_MC.2@265.216,135.509 265.216,139.613 265.684,140.081 R3_MC.1@270.637,140.081
NetC9_1: C9.1 FTDI.2 | length 3
  Bottom Layer w0.254: C9.1@213.328,97.566 213.358,97.596 FTDI.2@213.358,100.571
NetD6_1: D6.1 R31.2 T1.4 | length 7.9
  Top Layer w1.4: 296.07,66.5 D6.1@296.07,68.449 ; D6.1@296.1,68.453 299.734,68.453 300.355,67.832 R31.2@300.355,66.4
NetFTDI_1: FTDI.1 R33.1 | length 23.5
  Top Layer w0.254: v1(203.581,89.916) 203.581,91.059 204.47,91.948 R33.1@205.881,91.948
  Bottom Layer w0.254: v1(203.581,89.916) 210.82,89.916 214.558,93.654 214.558,100.047 FTDI.1@214.034,100.571
NetFTDI_5: FTDI.5 R34.1 | length 10.5
  Top Layer w0.254: R34.1@205.881,94.234 205.881,97.423 207.518,99.06 v1(208.462,99.06)
  Bottom Layer w0.254: v1(208.462,99.06) 208.773,99.371 211.059,99.371 211.33,99.642 FTDI.5@211.33,100.571
NetGRN_1: FTDI_G.1 R35.1 | length 6.7
  Top Layer w0.254: FTDI_G.1@212.272,102.355 212.272,95.645 R35.1@212.286,95.631
NetLATCH_RELAY_5: LATCH_RELAY.5 Y5.NO | length 64.7
  Top Layer w2.34: Y5.NO@227.584,74.455 227.584,67.056 218.186,57.658 218.186,52.832 223.52,47.498 246.179,47.498 LATCH_RELAY.5@252.522,53.842
NetMCU_5: MCU.5 tx_mc.1 U1_MC.1 | length 29.8
  Top Layer w0.254: tx_mc.1@259.969,134.493 259.969,133.731 262.636,131.064 v1(262.636,125.212)
  Bottom Layer w0.254: MCU.5@264.188,120.734 264.188,123.66 v1(262.636,125.212) 262.636,130.175 263.906,131.445 269.563,131.445 U1_MC.1@270.891,130.117
NetMCU_6: MCU.6 rx_mc.1 U1_MC.4 | length 16.9
  Top Layer w0.254: rx_mc.1@263.271,132.842 263.271,131.445 263.525,131.191 v1(263.525,129.921)
  Bottom Layer w0.254: MCU.6@264.688,120.734 264.688,123.783 263.525,124.946 v1(263.525,129.921) 263.525,130.175 264.033,130.683 265.557,130.683 266.123,130.117 U1_MC.4@267.081,130.117
NetMCU_51: MCU.51 tx_g.1 U1_G.1 | length 8.3
  Top Layer w0.254: U1_G.1@256.667,106.992 v1(256.667,111.506)
  Bottom Layer w0.254: v1(256.667,111.506) 256.676,111.506 257.404,112.234 MCU.51@260.188,112.234
NetMCU_52: MCU.52 rx_g.1 U1_G.4 | length 13.6
  Top Layer w0.254: U1_G.4@252.857,106.992 252.857,111.887 254.635,113.665 256.159,113.665 256.794,113.03 v1(257.175,113.03)
  Bottom Layer w0.254: v1(257.175,113.03) 257.048,112.902 257.216,112.734 MCU.52@260.188,112.734
NetR1_GEN_2: R1_G.2 U1_G.8 | length 10.8
  Top Layer w0.254: v1(250.615,103.505) R1_G.2@250.615,104.633 ; v1(256.667,100.076) U1_G.8@256.667,101.542
  Bottom Layer w0.254: v1(250.615,103.505) 250.615,102.235 252.774,100.076 v1(256.667,100.076)
NetR1_MC_2: R1_MC.2 U1_MC.8 | length 15.5
  Top Layer w0.254: v1(264.795,129.794) 264.795,134.747 267.603,137.555 v1(270.764,137.555)
  Bottom Layer w0.254: R1_MC.2@264.795,128.412 v1(264.795,129.794) ; v1(270.764,137.555) 270.764,135.694 U1_MC.8@270.891,135.567
NetR11_2: R11.2 U5.1 X2.3 | length 4.8
  Top Layer w0.254: R11.2@242.048,149.479 X2.3@244.348,149.479 244.37,149.457 U5.1@244.37,147
NetR32_2: R32.2 RVP_LED.2 | length 9.1
  Top Layer w1.4: RVP_LED.2@294.513,53.213 300.99,53.213 301.865,54.088 R32.2@301.865,55.499
NetR36_1: FTDI_R.1 R36.1 | length 4
  Top Layer w0.254: R36.1@202.62,102.475 205.682,102.475 206.049,102.108 FTDI_R.1@206.049,102.482
NetU2_5: U2.5 U3.1 | length 39.2
  Top Layer w0.254: U2.5@220.98,152.585 220.853,152.712 220.98,152.839 v1(220.98,154.94) ; v1(226.568,135.944) U3.1@229.489,135.944
  Bottom Layer w0.254: v1(220.98,154.94) 215.9,154.94 214.122,153.162 214.122,141.859 220.037,135.944 v1(226.568,135.944)
NetU2_7: U2.7 U3.2 | length 33.4
  Top Layer w0.254: v1(216.027,153.543) 216.154,153.543 216.535,153.924 218.186,153.924 218.44,153.67 U2.7@218.44,152.585 ; U3.2@230.759,135.944 v1(230.759,137.273)
  Bottom Layer w0.254: v1(216.027,153.543) 216.027,141.859 220.613,137.273 v1(230.759,137.273)
NetU3_4: U3.4 U4.5 | length 29.3
  Top Layer w0.254: U4.5@228.219,152.585 228.277,152.527 228.335,152.585 v1(229.108,152.585) ; U3.4@233.299,135.944 233.299,137.273 235.204,139.178 235.204,140.97 236.22,141.986 v1(237.363,141.986)
  Bottom Layer w0.254: v1(229.108,152.585) 230.066,152.585 230.378,152.273 230.378,148.336 230.759,147.955 233.426,147.955 234.823,146.558 238.633,146.558 239.268,145.923 239.268,143.891 v1(237.363,141.986)
NetU3_5: U3.5 U4.7 | length 32.7
  Top Layer w0.254: v1(225.679,150.749) U4.7@225.679,152.585 ; U3.5@234.569,135.944 v1(234.569,137.414)
  Bottom Layer w0.254: v1(225.679,150.749) 225.679,148.082 226.921,146.84 227.679,146.84 228.6,145.919 228.6,144.145 226.822,142.367 224.155,142.367 222.758,140.97 222.758,139.7 223.901,138.557 231.14,138.557 232.283,137.414 v1(234.569,137.414)
NetU7_2: U7.2 U7.6 U8.7 | length 17.7
  Top Layer w0.254: v1(229.616,149.098) 229.616,149.61 230.12,150.114 U8.7@231.59,150.114 ; v1(230.636,144.649) U7.6@232.003,144.649 232.91,144.649 233.41,144.149 U7.2@235.103,144.149
  Bottom Layer w0.254: v1(229.616,149.098) 229.616,148.082 230.759,146.939 233.426,146.939 233.807,146.558 233.807,145.669 233.299,145.161 231.148,145.161 v1(230.636,144.649)
NetY1_NO: Y1.NO Y2.COM | length 11.4
  Top Layer w2.34: Y2.COM@263.627,68.295 267.878,68.295 270.902,71.319 Y1.NO@270.902,74.199
NetY2_NO: Y2.NO Y3.COM | length 11.8
  Top Layer w2.34: Y3.COM@252.959,68.295 257.525,68.295 260.477,71.247 Y2.NO@260.477,74.295
NetY4_NO: Y4.NO Y5.COM | length 10.4
  Top Layer w2.34: Y5.COM@230.734,68.455 236.734,74.455 Y4.NO@238.633,74.455
PRECHARGE_5V: MCU.1 prchrg.1 U11.3 | length 67.5
  Top Layer w0.254: v1(249.428,126.238) 255.524,132.334 v1(255.524,132.969)
  Bottom Layer w0.254: U11.3@228.346,91.972 228.346,94.702 249.428,115.784 v1(249.428,126.238) v1@249.428,126.365 ; v1(255.524,132.969) 255.524,132.334 259.817,128.041 259.989,128.041 260.916,127.114 260.916,124.606 262.188,123.334 MCU.1@262.188,120.734
PRECHARGE_12V: U11.18 X1.B12 | length 216.6
  Top Layer w0.203: 285.623,135.926 285.623,136.906 285.242,137.287 285.242,138.428 300.609,153.795
  Top Layer w0.254: 285.623,135.926 X1.B12@286.639,134.91 ; 300.609,153.795 v1(300.609,155.575)
  Bottom Layer w0.254: U11.18@228.346,101.322 228.346,106.045 220.472,113.919 203.581,113.919 199.136,118.364 199.136,156.402 204.151,161.417 231.775,161.417 236.347,165.989 293.878,165.989 300.609,159.258 v1(300.609,155.575)
RESET: C9.2 FLASH.10 MCU.63 | length 77.7
  Top Layer w0.254: v1(210.82,94.107) 211.836,93.091 216.662,93.091 218.856,95.285 218.856,113.134 223.451,117.729 v1(239.522,117.729) ; v1(247.309,117.983) 248.579,116.713 252.374,116.713 253.136,117.475 FLASH.10@254.045,117.475 257.175,117.475 v1(258.191,118.491)
  Bottom Layer w0.254: v1(210.82,94.107) 210.82,94.052 211.978,95.21 C9.2@211.978,97.566 ; v1(239.522,117.729) 242.57,117.729 242.697,117.602 244.856,119.761 245.714,119.761 247.396,118.079 247.309,117.992 v1(247.309,117.983) ; v1(258.191,118.491) 258.826,118.491 259.083,118.234 MCU.63@260.188,118.234
RTDS_5V: MCU.45 rtds.1 U11.7 | length 62.1
  Top Layer w0.254: v1(258.064,114.808) rtds.1@260.223,114.808 261.366,114.808 262.678,113.496 262.678,111.591 262.89,111.379 v1(263.144,111.379)
  Bottom Layer w0.254: U11.7@223.266,91.972 223.266,90.664 224.776,89.154 229.997,89.154 232.283,91.44 232.283,97.79 249.809,115.316 250.444,115.316 251.231,116.103 256.007,116.103 256.769,115.341 257.047,115.341 257.073,115.316 257.556,115.316 v1(258.064,114.808) ; v1(263.144,111.379) 263.144,110.861 263.688,110.317 MCU.45@263.688,109.234
RTDS_12V: U11.14 X1.A32 | length 167.6
  Top Layer w0.254: X1.A32@292.139,100.91 294.64,98.409 294.64,94.996 303.784,85.852 v1(303.784,84.909)
  Bottom Layer w0.254: U11.14@223.266,101.322 223.266,99.187 220.091,96.012 220.091,85.725 237.998,67.818 237.998,51.689 243.459,46.228 268.799,46.228 295.756,73.185 299.448,73.185 301.244,74.981 301.244,80.137 303.784,82.677 v1(303.784,84.909)
TS_LIVE_5V: MCU.11 U9.13 | length 6.7
  Top Layer w0.254: v1(270.256,123.783) U9.13@270.256,125.56
  Bottom Layer w0.254: MCU.11@267.193,120.739 MCU.11@267.188,120.734 267.203,120.734 267.203,121.692 268.701,123.19 269.659,123.19 270.252,123.783 v1(270.256,123.783)
TS_LIVE_12V: ts_live.1 U9.9 X1.B7 | length 21.3
  Top Layer w0.254: U9.9@268.986,134.91 U9.9@268.986,135.001 268.986,136.144 269.621,136.779 271.154,136.779 271.688,137.313 271.688,139.394 274.534,142.24 281.309,142.24 X1.B7@284.139,139.41
TS_READY_5V: MCU.50 U13.13 | length 12.9
  Bottom Layer w0.254: MCU.50@260.188,111.734 259.181,111.734 258.953,111.506 258.953,110.871 259.715,110.109 259.715,106.426 261.747,104.394 U13.13@261.747,101.449 U13.13@261.747,101.085
TS_READY_12V: LATCH_RELAY.6 ts_rdy.1 U13.9 X1.A27 | length 133.9
  Top Layer w2.34: v2(244.856,59.309) 243.734,59.309 243.42,58.996 238.057,58.996 237.49,59.563 237.49,61.789 240.344,64.643 242.951,64.643 244.475,66.167 244.475,75.667 249.707,80.899 v2(255.524,80.899) ; 259.207,54.4 259.207,50.927 v2(259.334,50.8)
  Bottom Layer w1.5: v2(255.524,80.899) 255.524,85.344 260.477,90.297 U13.9@260.477,92.099
  Bottom Layer w2.34: v2(244.856,59.309) 245.11,59.309 247.396,57.023 LATCH_RELAY.6@247.396,53.968 250.564,50.8 v2(259.334,50.8) 265.938,50.8 295.275,80.137 295.275,83.82 293.497,85.598 292.451,85.598 X1.A27@292.139,85.91
TS_READY_SENSE_5V: MCU.54 U9.14 | length 19.5
  Top Layer w0.254: v1(271.272,120.523) 270.764,121.031 270.764,122.682 271.526,123.444 U9.14@271.526,125.56
  Bottom Layer w0.254: MCU.54@260.188,113.734 263.48,113.734 267.163,117.417 268.166,117.417 v1(271.272,120.523)
TS_READY_SENSE_12V: ts_rdy_sen.1 U9.7 X1.B5 | length 18.4
  Top Layer w0.254: U9.7@271.526,135.001 271.526,136.017 272.288,136.779 272.288,138.176 272.669,138.557 272.923,138.557 ts_rdy_sen.1@273.304,138.176 v1(273.304,136.779)
  Bottom Layer w0.254: v1(273.304,136.779) 275.463,134.62 278.446,134.62 279.656,133.41 X1.B5@284.139,133.41
VCC_3V3: C11.2 FTDI.17 | length 3.9
  Bottom Layer w0.254: FTDI.17@206.598,107.821 206.63,107.853 206.63,110.095 207.097,110.562 C11.2@207.097,111.506
pads on no net: FLASH.7 FLASH.9 FLASH.MH1 FLASH.MH2 FTDI.3 FTDI.6 FTDI.8 FTDI.9 FTDI.10 FTDI.11 FTDI.12 FTDI.13 FTDI.14 FTDI.24 FTDI.27 FTDI.28 J1.4 J1.6 J1.7 J1.8 J1.9 J1.10 J1.11 LATCH_RELAY.7 LDO.5 LDO.hole MC_PWR.3 MCU.4 MCU.13 MCU.16 MCU.17 MCU.18 MCU.19 MCU.20 MCU.21 MCU.22 MCU.23 MCU.25 MCU.33 MCU.35 MCU.53 MCU.55 MCU.56 MCU.57 MCU.60 T2.THM U3.3 U3.11 U8.3 U8.4 U8.5 U9.4 U9.8 U10.4 U10.8 U10.9 U10.13 U11.4 U11.8 U12.4 U12.8 U12.9 U12.13 U13.3 U13.4 U13.8 U13.18 X1.A6 X1.A7 X1.A12 X1.A13 X1.A20 X1.A21 X1.A31 X1.B6 X1.B9 X1.B10 X1.B15 X1.B16 X1.B17 X1.B18 X1.B24 X1.CH X1.LH X1.RH X2.1 Y1.NC Y2.NC Y3.NC Y4.NC Y5.NC

## Polygon pours and split planes (outlines as drawn)
DGND on Bottom Layer "DGND" (solid, shelved, pour order 0): 307.213,172.212 307.213,37.719 197.231,37.719 197.231,172.212
GLV on Top Layer "GLV" (solid, shelved, pour order 2): 197.231,172.212 307.213,172.212 307.213,37.719 197.231,37.719

## Silkscreen, mask and mechanical layers (free items; w line width, h text height)
Top Overlay:
  lines w0.254: 200.533,119.38 204.978,114.935 238.887,114.935 243.84,119.888 243.84,129.286 248.158,133.604 251.406,133.604 255.143,137.341 255.143,155.575 251.079,159.639 250.26,159.639 204.47,159.639 200.533,155.702 200.533,119.38
  text "BSPD" at 239.776,155.702 h2.5
  text "a" at 177.728,88.011 h32 r270
  text "Design and Layout by: Jonathan Lau" at 200.406,87.376 h1 r270

## Text inside footprints (layer, text, board x,y; h text height)
X1: Top Overlay "SUPER SEAL" at 280.605,79.216 h1.52 r90